# Altium PCB PCB1.PcbDoc
Units mm, origin at the board's own origin, x right, y up, seen from the top; angles counter-clockwise.
Board outline 152.4 x 101.6 mm, 2 copper layers (Top Layer, Bottom Layer); 4 components, 7 nets, 16 pads, 0 vias.
Unrouted connection lines stored in the file: 1.
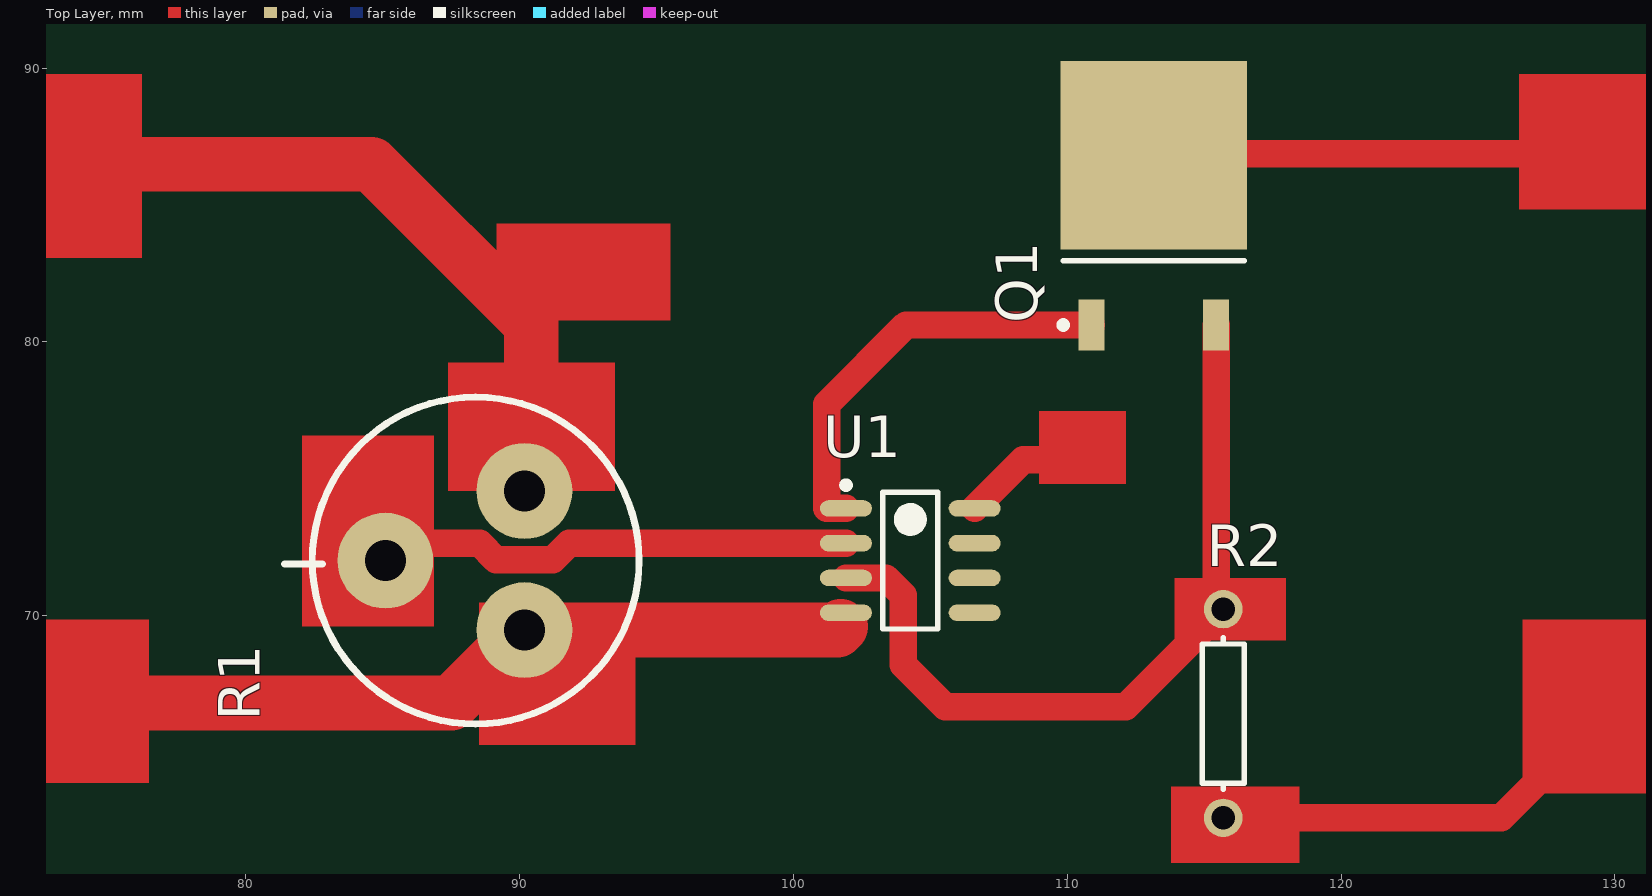
[diagram p0: Top Layer view]
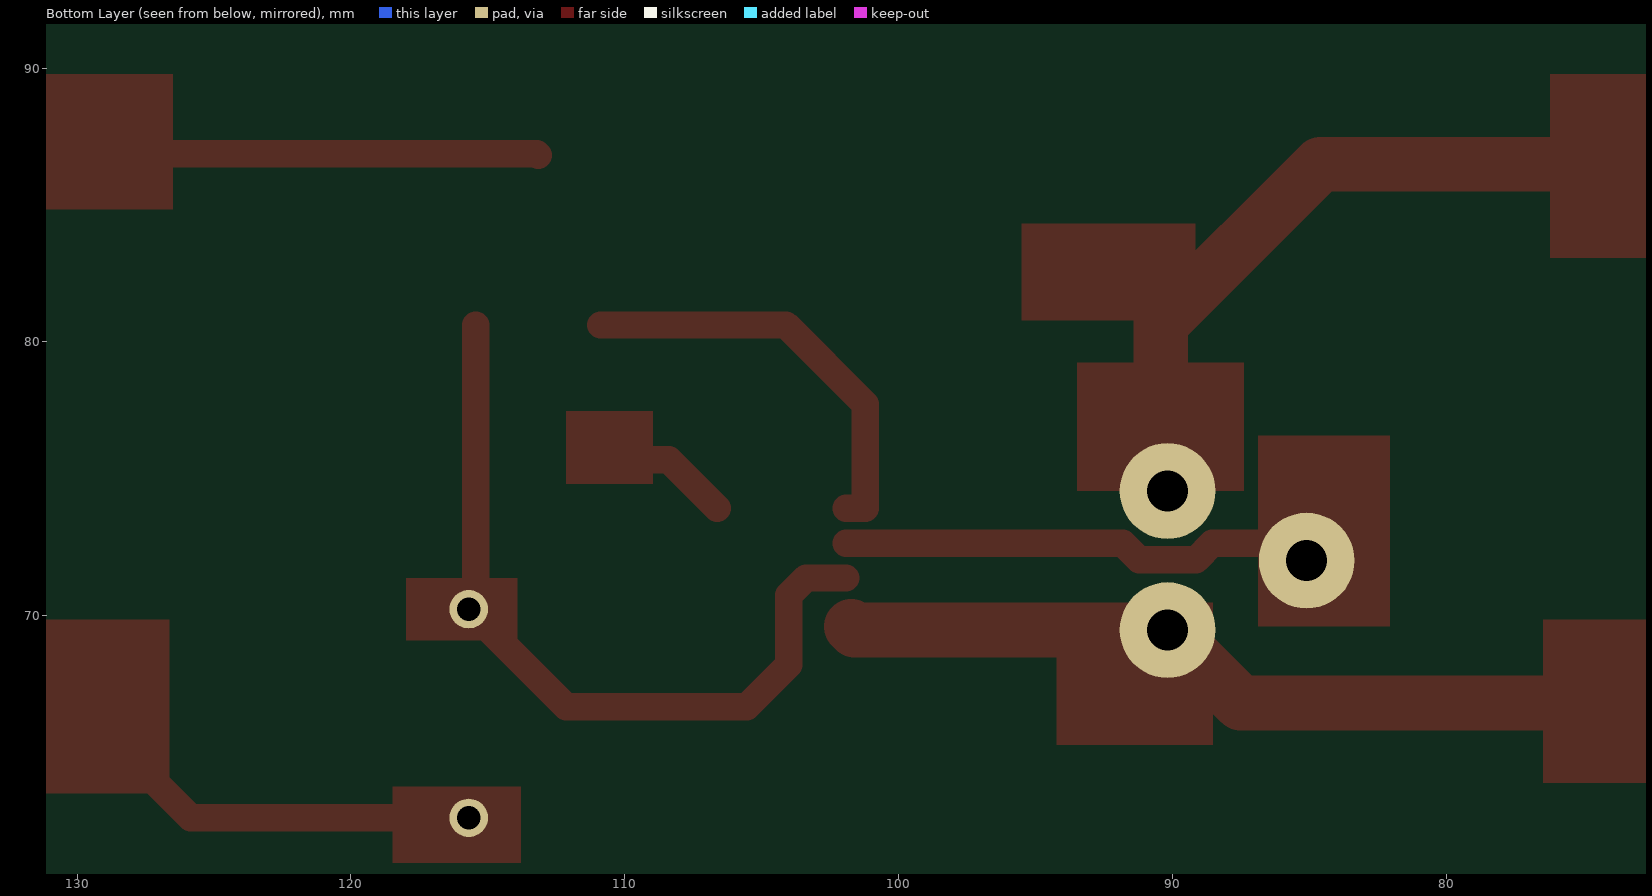
[diagram p1: Bottom Layer view, seen from below]

## Layer stack, top to bottom
Top Solder: solder mask 0.0102, Solder Resist, Dk 3.5
Top Layer: signal copper 0.0356
Dielectric 1: dielectric 0.32, FR-4, Dk 4.8
Bottom Layer: signal copper 0.0356
Bottom Solder: solder mask 0.0102, Solder Resist, Dk 3.5

## Board outline
25.4,25.4 177.8,25.4 177.8,127 25.4,127

## Design rules (kind name [scope] priority, off if disabled: settings)
Clearance [All] p1: gap=0.254
PolygonConnect [All] p1: connectstyle=Relief reliefconductorwidth=0.254 reliefentries=4 polygonreliefangle="90 Angle" airgapwidth=0.254
RoutingVias [All] p1: holewidth=0.711 width=1.27 viastyle="Through Hole" minholewidth=0.711 minwidth=1.27 maxholewidth=0.711 maxwidth=1.27
SolderMaskExpansion [All] p1: expansion=0.102
Width [All] p1: maxlimit=2 minlimit=0.254 preferedwidth=0.254
30 further rules are at their usual default settings.

## Components (designator, comment, footprint, x,y, rotation, side; value= is the part's Value field where it differs from the comment)
Q1 "MESFET-N" DPAK228P962X230-3N 113.157,84.963 r90 top
R1 "RPot" Rm065-v1 90.17,69.469 r90 top
R2 "Res1" AXIAL-0.3 115.697,66.421 r90 top
U1 "LM358DR" D008_L 104.267,72.009 r0 top

## Footprints (in the part's own frame and the unit in brackets; to place one, negate y for a bottom-side part, rotate by r counter-clockwise, add the part's x,y. Pads: shape width x height; smd on the part's side, far side on the other; paste and mask are expansions set on the pad)
AXIAL-0.3 [mm] "Axial Device, Thru-Hole; 2 Leads; 0.3 in Pin Spacing"
  round 1.4 hole 0.85: 1(-3.81,0) 2(3.81,0)
  silkscreen extent -2.77,-0.76 2.77,0.76
D008_L [mm] "SOIC, 8-Leads, Body 4.9x3.9mm, Pitch 1.27mm, IPC High Density"
  oval 1.9x0.6 smd: 1(-2.35,1.905) 2(-2.35,0.635) 3(-2.35,-0.635) 4(-2.35,-1.905) 5(2.35,-1.905) 6(2.35,-0.635) 7(2.35,0.635) 8(2.35,1.905)
  silkscreen extent -2.47,-2.5 1,2.88, body extent -2,-2.5 2,2.5, height 1.75
DPAK228P962X230-3N [mm] "D-PAK, 3-Pads, Body 5.85x6.66mm (max), IPC Medium Density"
  rect 1.85x0.95 smd: 1(-4.35,2.28) 3(-4.35,-2.28)
  rect 6.9x6.8 smd: 2(1.85,0)
  silkscreen extent -4.47,-3.3 -2,3.43, body extent -1.8,-3.3 3.7,3.3, height 2.3
Rm065-v1 [mm]
  round 3.5 hole 1.5: 1(0,0) 2(5.08,0) 3(2.54,5.08)
  silkscreen extent -3.43,-4.19 8.51,8.76

## Part data
Q1: "N-Channel MESFET"
R1: "Potentiometer"
R2: "Resistor"
U1: "Dual Operational Amplifier"

## Nets (pads, with @x,y where several pads share a name; then routed paths per layer and width w, separated by ;. In a path a pad name is that pad's centre, name@x,y a point inside that pad or via, vN(x,y) a via of type N, cw(c..) or ccw(c..) an arc to the next point about the centre after c; other vN are vias at no path point)
5V: R1.2 U1.8 | length 29.5
  Top Layer w0.254: 74.803,89.535 74.93,89.662
  Top Layer w1: U1.8 108.395,75.692 109.982,75.692 110.109,75.819
  Top Layer w2: 74.041,86.487 84.582,86.487 90.424,80.645 90.424,74.803 R1.2
+LOAD: Q1.2 | length 15.4
  Top Layer w0.254: 129.667,89.535 129.794,89.662
  Top Layer w1: Q1.2 113.212,86.868 128.397,86.868
-LOAD: R2.1 | length 14.7
  Top Layer w1: R2.1 125.857,62.611 129.032,65.786
GND: R1.1 U1.4 | length 31
  Top Layer w0.254: 74.422,67.437 74.422,69.723
  Top Layer w2: 74.168,66.802 87.503,66.802 R1.1 101.6,69.469 101.727,69.596
NetQ1_1: Q1.1 U1.1 | length 15.4
  Top Layer w1: U1.1 101.219,73.914 101.219,77.724 104.108,80.613 Q1.1
NetQ1_3: Q1.3 R2.2 U1.3 | length 29.2
  Top Layer w1: U1.3 103.378,71.374 104.013,70.739 104.013,68.199 105.537,66.675 112.141,66.675 R2.2 115.437,70.491 Q1.3
NetR1_3: R1.3 U1.2 | length 17.6
  Top Layer w1: R1.3 85.725,72.644 88.534,72.644 89.133,72.045 91.207,72.045 91.806,72.644 U1.2
pads on no net: U1.5 U1.6 U1.7

## Other copper
Top Layer:
  rectangle net -LOAD: 113.792,60.96 118.491,63.754
  rectangle net NetQ1_3: 113.919,69.088 117.983,71.374
  rectangle net 5V: 87.376,74.549 93.472,79.248
  rectangle net GND: 88.519,65.278 94.234,70.485
  rectangle net NetR1_3: 82.042,69.596 86.868,76.581
  rectangle net 5V: 89.154,80.772 95.504,84.328
  rectangle net 5V: 108.966,74.803 112.141,77.47
  rectangle net -LOAD: 126.619,63.5 132.08,69.85
  rectangle net +LOAD: 126.492,84.836 131.699,89.789
  rectangle net 5V: 72.136,83.058 76.2,89.789
  rectangle net GND: 72.136,63.881 76.454,69.85